# Altium PCB ELosd_rev0.1.PcbDoc
Units mm, origin at the board's own origin, x right, y up, seen from the top; angles counter-clockwise.
Board outline 152.4 x 101.6 mm, 2 copper layers (Top Layer, Bottom Layer), stack 1.569 mm thick; 45 components, 34 nets, 118 pads, 2 vias.
Unrouted connection lines stored in the file: 22.
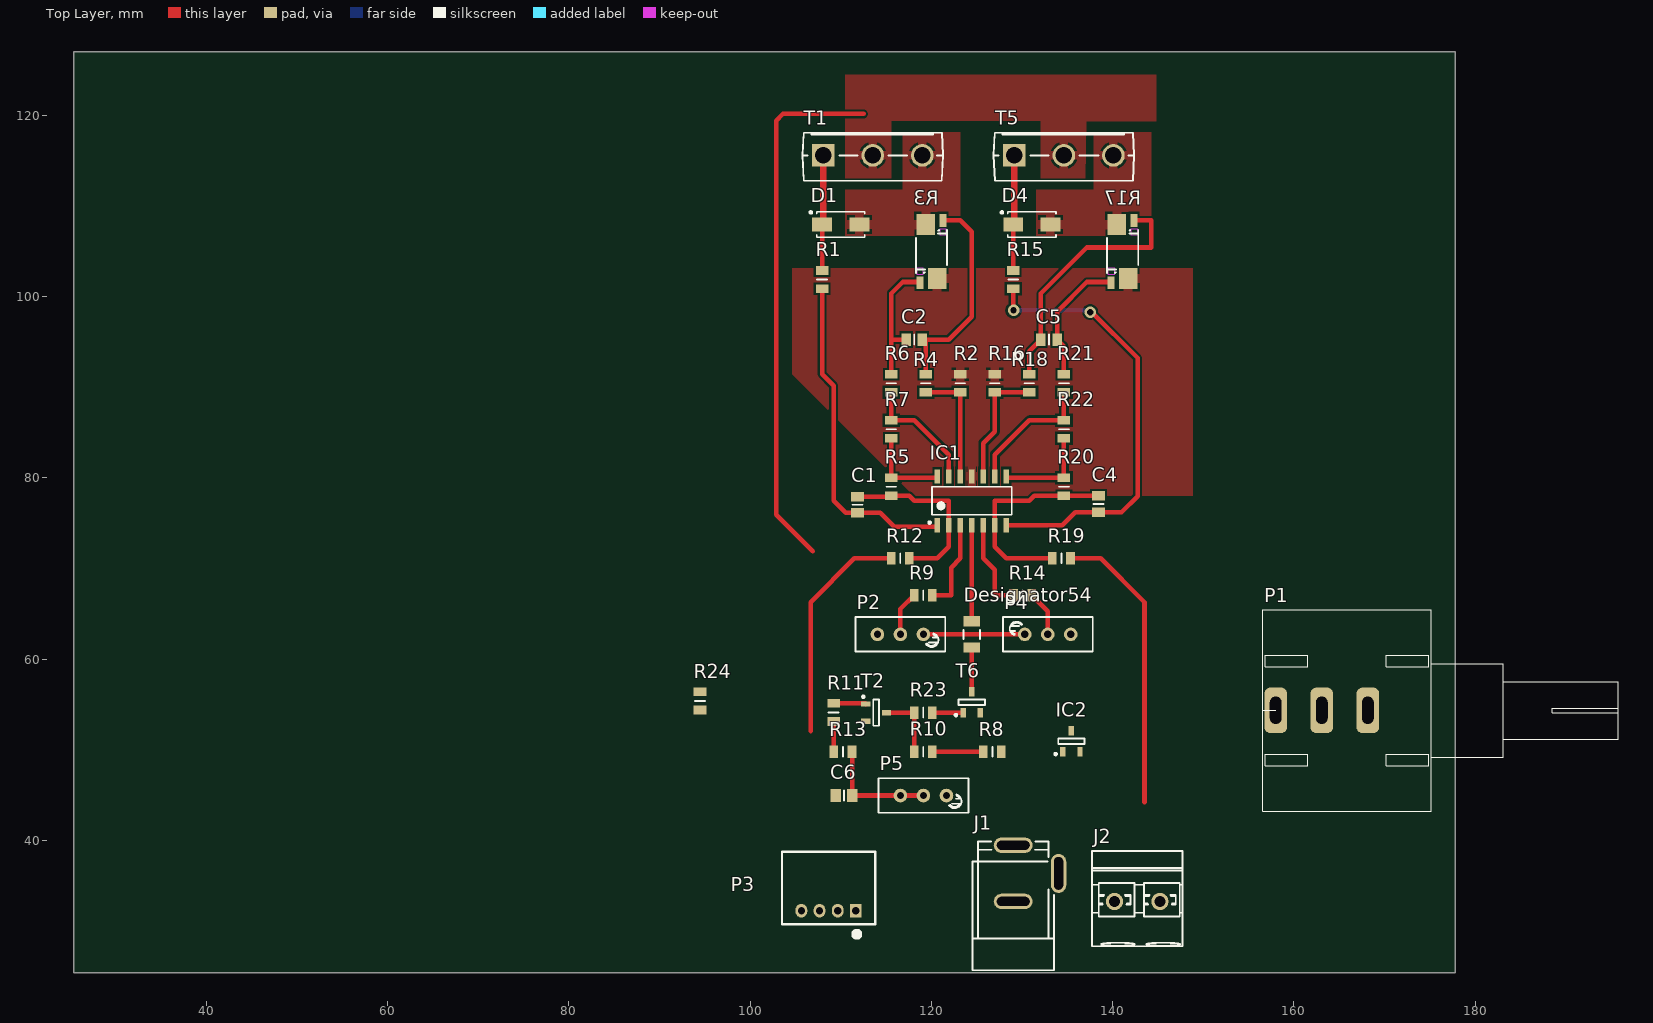
[diagram p0: Top Layer view]
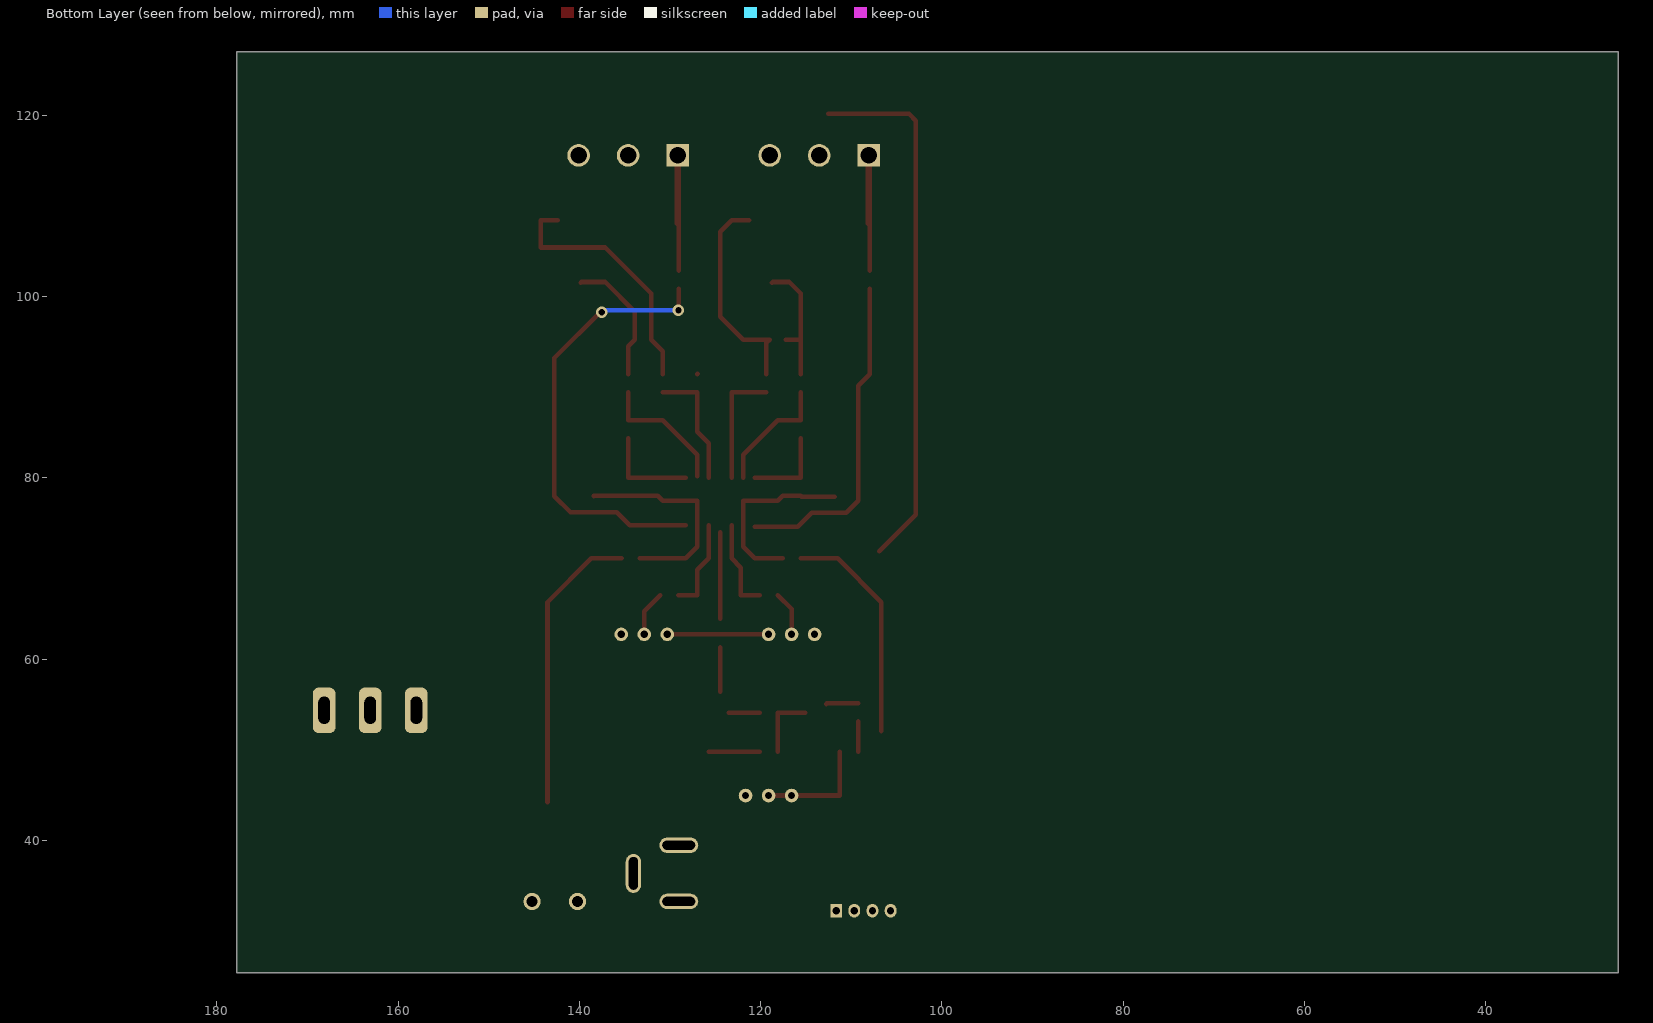
[diagram p1: Bottom Layer view, seen from below]
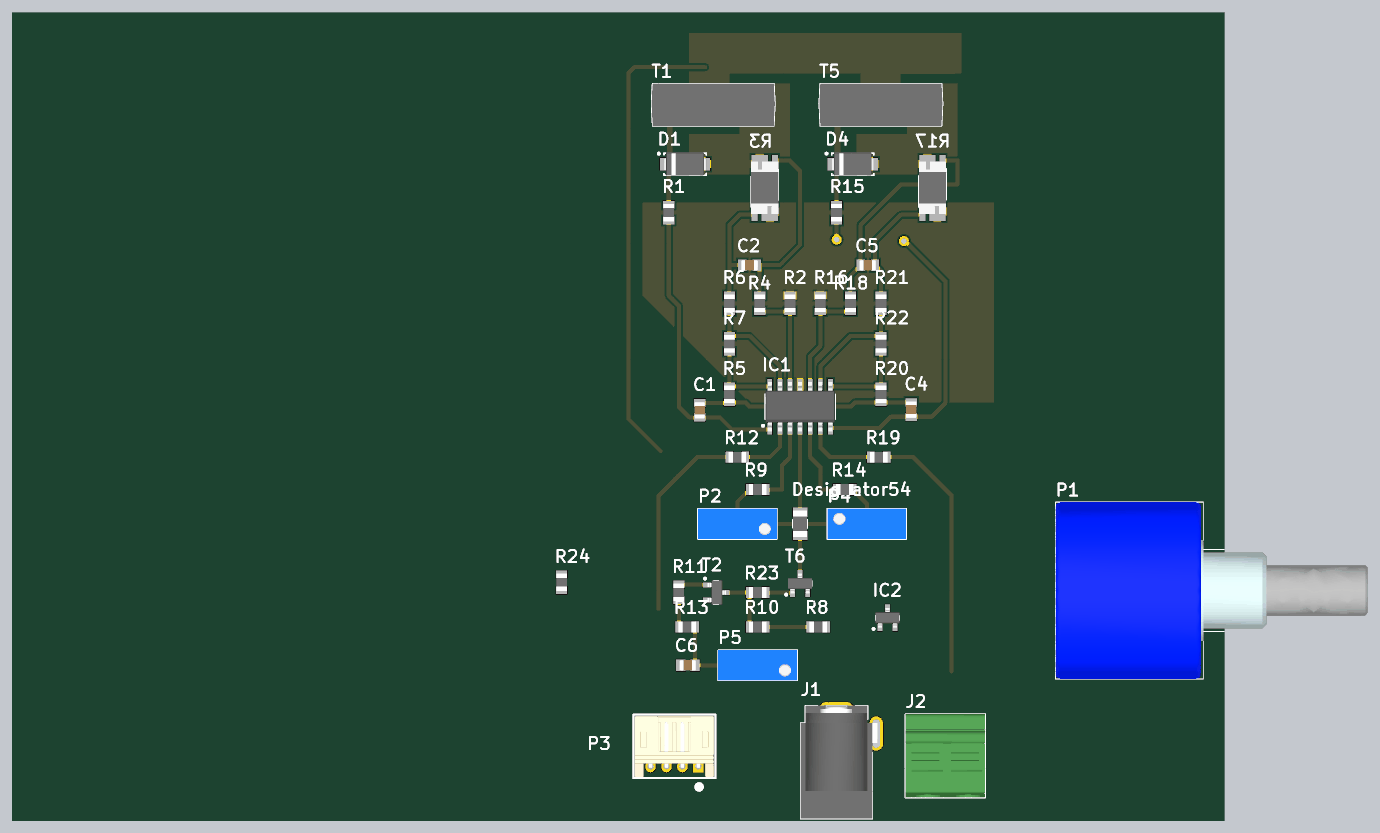
[diagram p2: 3D render of the assembled board from above, using the file's embedded part models]

## Layer stack, top to bottom
Top Solder: solder mask 0.0254, SM-001, Dk 4
Top Layer: signal copper 0.035
Dielectric 1: core 1.4986, Core-043, Dk 4.3
Bottom Layer: signal copper 0.035
Bottom Solder: solder mask 0.0254, SM-001, Dk 4

## Board outline
25.4,25.4 177.8,25.4 177.8,127 25.4,127

## Design rules (kind name [scope] priority, off if disabled: settings)
Clearance [All] p1: gap=0.254 ignorepadtopadclearanceinfootprint=FALSE except(0: Arc-Hole Track-Hole SMDPad-Hole THPad-Hole Via-Hole Fill-Hole Poly-Hole Region-Hole Text-Hole)
PolygonConnect [All] p1: connectstyle=Relief reliefconductorwidth=1 reliefentries=4 polygonreliefangle="90 Angle" airgapwidth=0.254
RoomDefinition ELoad_rev0.1 [InComponentClass('ELoad_rev0.1')] p1: confinementstyle=ConfineIn formatcopy=TRUE lockcomponents=FALSE outline 178.943,26.924 246.761,26.924 246.761,45.466 178.943,45.466
RoutingVias [All] p1: holewidth=0.711 width=1.27 viastyle="Through Hole" minholewidth=0.711 minwidth=1.27 maxholewidth=0.711 maxwidth=1.27
SolderMaskExpansion [All] p1: expansion=0.102 istentingtop=FALSE
Width [All] p1: maxlimit=2.54 minlimit=0.254 preferedwidth=0.254
30 further rules are at their usual default settings.

## Components (designator, comment, footprint, x,y, rotation, side; value= is the part's Value field where it differs from the comment)
C1 "100nF" CAPC2012X135N 111.848,77.032 r270 top
C2 "100nF" CAPC2012X135N 118.11,95.25 r0 top
C4 "100nF" CAPC2012X135N 138.43,77.1 r270 top
C5 "100nF" CAPC2012X135N 132.98,95.25 r180 top
C6 "100nF" CAPC2012X88N 110.352,44.958 r0 top
D1 "SS16" DIOM5127X229N 110,107.95 r0 top
D4 "SS16" DIOM5127X229N 131.082,107.95 r0 top
Designator54 "Comment" RESC3216X65N 124.46,62.738 r90 top
IC1 "LM324M" SOIC127P600X175-14N 124.46,77.47 r90 top
IC2 "TL431ACDBZT" SOT95P237X112-3N 135.448,50.934 r90 top
J1 "Jack" CLIFF_FC68148(DC-10A) 129.032,33.274 r0 top
J2 "" PHOENIX_1792863 142.708,33.274 r0 top
P1 "10k" 3590S 157.988,54.356 r90 top
P2 "1k" TRIM_BOURNS_3290W 116.586,62.738 r180 top
P3 "NXW-04K" NXW-04K 111.664,32.258 r180 top
P4 "1k" TRIM_BOURNS_3290W 132.842,62.738 r0 top
P5 "20k" TRIM_BOURNS_3290W 119.126,44.958 r180 top
R1 "100" RESC2012X60N 107.95,101.87 r90 top
R2 "25k5" RESC2012X60N 123.19,90.44 r90 top
R3 "0R002" RES_VISHAY_WSK2512_0R005-0R2 120.015,104.965 r270 top
R4 "1k" RESC2012X60N 119.38,90.44 r90 top
R5 "2k" RESC2012X60N 115.57,79.01 r90 top
R6 "1k" RESC2012X60N 115.57,90.44 r90 top
R7 "25k5" RESC2012X60N 115.57,85.36 r90 top
R8 "2k" RESC2012X60N 126.73,49.784 r180 top
R9 "2k" RESC2012X60N 119.11,67.056 r0 top
R10 "10k" RESC2012X60N 119.11,49.784 r0 top
R11 "2k" RESC2012X60N 109.22,54.118 r90 top
R12 "1k" RESC2012X60N 116.57,71.12 r0 top
R13 "220k" RESC2012X60N 110.252,49.784 r180 top
R14 "2k" RESC2012X60N 130.064,67.056 r180 top
R15 "100" RESC2012X60N 129.032,101.87 r90 top
R16 "25k5" RESC2012X60N 127,90.44 r90 top
R17 "0R002" RES_VISHAY_WSK2512_0R005-0R2 141.097,104.965 r270 top
R18 "1k" RESC2012X60N 130.81,90.44 r90 top
R19 "1k" RESC2012X60N 134.35,71.12 r180 top
R20 "2k" RESC2012X60N 134.62,79.01 r90 top
R21 "1k" RESC2012X60N 134.62,90.44 r90 top
R22 "25k5" RESC2012X60N 134.62,85.36 r90 top
R23 "100" RESC2012X60N 119.11,54.102 r0 top
R24 "25k5" RESC2012X60N 94.488,55.388 r90 top
T1 "IRFP140NPBF" TO-247AC-v 113.538,115.57 r0 top
T2 "BC846B" SOT95P230X110-3N 113.912,54.102 r0 top
T5 "IRFP140NPBF" TO-247AC-v 134.62,115.57 r0 top
T6 "IRLML6402PBF" SOT95P237X112-3N 124.46,55.238 r90 top

## Footprints (in the part's own frame and the unit in brackets; to place one, negate y for a bottom-side part, rotate by r counter-clockwise, add the part's x,y. Pads: shape width x height; smd on the part's side, far side on the other; paste and mask are expansions set on the pad)
3590S [mm]
  rrect50% 5x2.5 hole 1.27 slot 3 at 0 deg: 1(0,-5.08) 2(0,0) 3(0,-10.16)
  silkscreen extent -11.13,-37.78 11.11,1.44, body extent -11.11,-37.78 11.11,1.44, height 22.22
CAPC2012X88N [mm] "Chip Capacitor, Body 2.0x1.25mm, IPC Medium Density"
  rect 1.15x1.45 smd: 1(-0.9,0) 2(0.9,0)
  silkscreen extent 0,-0.58 0,0.58, body extent -1.05,-0.67 1.05,0.68, height 0.9
CAPC2012X135N [mm] "Chip Capacitor, Body 2.0x1.25mm, IPC Medium Density"
  rect 1.05x1.4 smd: 1(-0.9,0) 2(0.9,0)
  silkscreen extent 0,-0.58 0,0.58, body extent -1.05,-0.67 1.05,0.68, height 1.25
CLIFF_FC68148(DC-10A) [mm] "12V /  5A, 2.1mm Diameter Pin, DC Power Socket With  Switch. DC10A Type"
  rrect100% 4.3x1.7 hole 1 slot 3.6 at 0 deg: 1(0,6.2) 3(0,0)
  rrect100% 1.7x4.3 hole 1 slot 3.6 at 90 deg: 2(5,3.1)
  silkscreen extent -4.5,-7.6 4.5,6.6, body extent -4.5,-7.6 5.2,6.6, height 11
DIOM5127X229N [mm] "DO-214-AC/SMA Molded Diode, 2-Leads, Body 5.1x2.7mm, IPC Medium Density"
  rect 2.2x1.55 smd: 1(-2.05,0) 2(2.05,0)
  silkscreen extent -3.42,-1.4 2.65,1.45, body extent -2.67,-1.45 2.68,1.45, height 2.29
NXW-04K [mm]
  rect 1.3x1.5 hole 0.8: 1(0,0)
  oval 1.3x1.5 hole 0.8: 2(2,0) 3(4,0) 4(6,0)
  silkscreen extent -2.15,-6.5 8.15,2.9, body extent -2,-6.35 8,1.35, height 5
PHOENIX_1792863 [mm] "PHOENIX PTS Serie, Pitch 5mm, 12A, 400V, 2 Positions Header"
  round 1.9 hole 1.2: 1(-2.5,0) 2(2.5,0)
  silkscreen extent -5,-4.95 5,5.55, body extent -5,-4.95 5,5.55, height 13.6
RES_VISHAY_WSK2512_0R005-0R2 [mm] "EIA 2512, Metric 6332, Current Sense Resistor, Chip, 0.89mm H, IPC Medium Density"
  rect 1.4x0.76 smd: E1(-3.43,1.27) E2(3.43,-1.27)
  rect 2.29x2.03 smd: I1(-2.985,-0.635) I2(2.985,0.635)
  Top Layer keep-out region: -2.48,0.89 -1.84,0.89 -1.84,1.65 -2.48,1.65
  Top Layer keep-out region: 2.48,-0.89 1.84,-0.89 1.84,-1.65 2.48,-1.65
  silkscreen extent -2.38,-1.72 2.38,1.72, body extent -3.3,-1.72 3.3,1.72, height 0.89
RESC2012X60N [mm] "Chip Resistor, EIA 0805, Metric 2012, Body 2.0x1.2mm, IPC Medium Density"
  rect 0.95x1.4 smd: 1(-1,0) 2(1,0)
  silkscreen extent 0,-0.55 0,0.55, body extent -1.1,-0.67 1.1,0.68, height 0.6
RESC3216X65N [mm] "Chip Resistor, EIA 1206, Metric 3216, Body 3.2x1.6mm, IPC Medium Density"
  rect 1.15x1.8 smd: 1(-1.45,0) 2(1.45,0)
  silkscreen extent -0.5,-0.9 0.5,0.9, body extent -1.67,-0.87 1.68,0.88, height 0.65
SOIC127P600X175-14N [mm] "SOIC 14, Pitch 1.27mm - Body 4x8.75mm, IPC Medium Density"
  rect 1.55x0.6 smd: 1(-2.7,3.81) 2(-2.7,2.54) 3(-2.7,1.27) 4(-2.7,0) 5(-2.7,-1.27) 6(-2.7,-2.54) 7(-2.7,-3.81) 8(2.7,-3.81) 9(2.7,-2.54) 10(2.7,-1.27) 11(2.7,0) 12(2.7,1.27) 13(2.7,2.54) 14(2.7,3.81)
  silkscreen extent -2.52,-4.4 1.55,4.78, body extent -3.1,-4.37 3.1,4.38, height 1.75
SOT95P230X110-3N [mm] "SOT23, 3 pin, Pitch 0.95mm - 1.3mm W X 2.9mm L X 1.1mm H, IPC Medium Density"
  rect 1x0.6 smd: 1(-1.15,0.95) 2(-1.15,-0.95) 3(1.15,0)
  silkscreen extent -1.52,-1.45 0.33,1.87, body extent -1.08,-1.5 1.25,1.5, height 1.1
SOT95P237X112-3N [mm] "SOT, 0.95mm, pitch; 3 pin,1.30mm W X 2.92mm L X 1.12mm H body, IPC Medium Density"
  rect 1.05x0.6 smd: 1(-1.15,0.95) 2(-1.15,-0.95) 3(1.15,0)
  silkscreen extent -1.52,-1.45 0.3,1.87, body extent -1.25,-1.5 1.25,1.5, height 1.1
TO-247AC-v [mm] "TO-247AC 3-Terminal - Vertical Mount"
  rect 2.5x2.5 hole 1.8: 1(-5.46,0)
  round 2.5 hole 1.8: 2(0,0) 3(5.46,0)
  silkscreen extent -7.75,-2.8 7.75,2.5, body extent -7.75,-2.8 7.75,2.5, height 26.75
TRIM_BOURNS_3290W [mm] "Trimming Potentiometer BOURNS 3290W Series"
  round 1.5 hole 0.8: 1(-2.54,0) 2(0,0) 3(2.54,0)
  silkscreen extent -4.95,-1.91 4.95,1.91, body extent -4.95,-1.9 4.95,1.9, height 10.93

## Part data
C1 C2 C4 C5: library part CC0805_100NF_50V_10%_X7R, "Non-polarised capacitor", Case=0805, Manufacturer=GENERIC, Manufacturer1 ComponentHeight=1mm, Manufacturer1 Example=TDK, Manufacturer1 Part Number=C2012X7R1H104K085AA, Tolerance=±10%, Voltage=50V, Author="CERN DEM JLC", Component Type=Standard, CreateDate=12/3/2007, HelpURL=\\cern.ch\dfs\Applications\Altium\Datasheets\CC0805_X7R_TDK_C.pdf, LatestRevisionDate=4/22/2015, Manufacturer Part Number=CC0805_100NF_50V_10%_X7R, Mounted=Yes, Part Description="SMD Multilayer Chip Ceramic Capacitor", Part Number=CC0805_100NF_50V_10%_X7R, Pin Count=2, Sense=No, SMD=Yes, Socket=No, Status=Preferred, TC=X7R
C6: library part CC0805_100NF_50V_10%_X7R_YUDEN_UMK212B7104KGH, "Non-polarised capacitor", Case=0805, Manufacturer="TAIYO YUDEN", Manufacturer Part Number=UMK212B7104KGH, Tolerance=±10%, Voltage=50V, Author="CERN DEM JLC", Component Type=Standard, ComponentHeight=1.35mm, CreateDate=23.04.2015, HelpURL=\\cern.ch\dfs\Applications\Altium\Datasheets\CC0805_TAIYO-YUDEN_UMK212B7104KGH.pdf, LatestRevisionDate=23.04.2015, Mounted=Yes, Part Description="SMD Multilayer Chip Ceramic Capacitor (High Dielectric Type) for Automotive / Industrial Applications", Part Number=CC0805_100NF_50V_10%_X7R_YUDEN_UMK212B7104KGH, Pin Count=2, Sense=No, SMD=Yes, Socket=No, Status="Not Recommended", TC=X7R
D1 D4: "Schottky Diode", Case=DO-214AC, Manufacturer="VISHAY GENERAL SEMICONDUCTOR", Power=1A, Voltage=60V, Author="CERN DEM JLC", Bonding=No, Component Type=Standard, ComponentHeight=2.29mm, CreateDate=7/15/2008, Device=SS16, HelpURL=\\cern.ch\dfs\Applications\Altium\Datasheets\SS16.pdf, LatestRevisionDate=8/23/2010, Manufacturer Part Number=SS16, Mounted=Yes, PackageDescription="DO-214-AC Molded Diode, Body 5.1x2.7mm, IPC Medium Density", Part Description="Surface Mount Schottky Barrier Rectifier", Part Number=SS16, Pin Count=2, PressFit=No, Sense=No, SMD=Yes, Socket=No
Designator54: library part R1206_0R_JUMPER
IC1: "Quad Operational Amplifier", Case=SOIC14, Manufacturer="FAIRCHILD SEMICONDUCTOR", Author="CERN DEM JLC", Bonding=No, Component Type=Standard, ComponentHeight=1.80mm, CreateDate=8/20/2008, Device=LM324M, HelpURL=\\cern.ch\dfs\Applications\Altium\Datasheets\LM324M.pdf, LatestRevisionDate=8/20/2008, Manufacturer Part Number=LM324M, Mounted=Yes, PackageDescription="SOIC 14, Pitch 1.27mm - Body 4x8.75mm, IPC Medium Density", Part Description="Quad Operational Amplifier", Part Number=LM324M, Pin Count=14, PressFit=No, Sense=No, SMD=Yes, Socket=No, Status="Not recommended"
IC2: "Precision Reference 1=Cathode 2=Adj 3=Anode", Case=SOT23, Manufacturer="TEXAS INSTRUMENTS", Author="CERN DEM JLC", Bonding=No, Component Type=Standard, ComponentHeight=1.12mm, CreateDate=2/28/2011, Device=TL431ACDBZT, HelpURL=\\cern.ch\dfs\Applications\Altium\Datasheets\TL431ACDBZT.pdf, LatestRevisionDate=2/28/2011, Manufacturer Part Number=TL431ACDBZT, Mounted=Yes, PackageDescription="SOT, 0.95mm, Pitch; 3 pin,1.30mm W X 2.92mm L X 1.12mm H Body, IPC Medium Density", Part Description="Vref (2.5V) To 36V 1% Precision Programmable Reference", Part Number=TL431ACDBZT, Pin Count=3, PressFit=No, Sense=No, SMD=Yes, Socket=No
J1: library part CLIFF_FC68148(DC-10A), "12V /  5A, 2.1mm Diameter Pin, DC Power Socket With  Switch. DC10A Type", Manufacturer="CLIFF ELECTRONIC COMPONENTS", Manufacturer Part Number="FC68148 (DC-10A)", Author="CERN DEM JLC", Component Type=Standard, ComponentHeight=11mm, CreateDate=11/23/2010, Family=Jack, HelpURL=\\cern.ch\dfs\Applications\Altium\Datasheets\CLIFF_FC68148(DC-10A).pdf, LatestRevisionDate=11/23/2010, Mounted=Yes, Part Description="12V/5A, 2.1mm Diameter Pin, DC Power Socket With  Switch (DC10A Type)", Part Number=CLIFF_FC68148(DC-10A), Pin Count=3, PressFit=No, Sense=No, SMD=No, Socket=No, Status=None
J2: library part PHOENIX_1792863, "Connector 2 Female", Manufacturer="PHOENIX CONTACT", Manufacturer Part Number="1792863 (PTS 1,5/ 2-5,0-H)", Author="CERN DEM JLC", Component Type=Standard, ComponentHeight=9.2mm, CreateDate=3/24/2014, HelpURL=\\cern.ch\dfs\Applications\Altium\Datasheets\PHOENIX_1792863.pdf, LatestRevisionDate=3/24/2014, Mounted=Yes, Part Description="12A 400V, Pitch: 5mm, 2 Positions Terminal Block (Spring-Cage Connection)", Part Number=PHOENIX_1792863, Pin Count=2, PressFit=No, Sense=No, SMD=No, Socket=No, Status=None
P1: library part TRIM_25T_10K_BOURNS_3296Y-1-103LF, "Trimming Potentiometer", Case=3296Y, Manufacturer=BOURNS, Manufacturer Part Number=3296Y-1-103LF, Power=0.5W, Tolerance=±10%, Author="CERN DEM JLC", Component Type=Standard, ComponentHeight=11.55mm, CreateDate=10/20/2008, HelpURL=\\cern.ch\dfs\Applications\Altium\Datasheets\TRIM_BOURNS_3296Y.pdf, LatestRevisionDate=11/28/2012, Mounted=Yes, Part Description="25 Turn Trimming Potentiometer (Top Adjustement)", Part Number=TRIM_25T_10K_BOURNS_3296Y-1-103LF, Pin Count=3, PressFit=No, Sense=No, SMD=No, Socket=No, TC=±100ppm/°C
P2 P4: library part TRIM_25T_1K_BOURNS_3290W-1-102, "Trimming Potentiometer", Case=3290W, Manufacturer=BOURNS, Manufacturer Part Number=3290W-1-102, Power=1W, Tolerance=±5%, Author="CERN DEM MR", Component Type=Standard, ComponentHeight=9.91mm, CreateDate=11/23/2016, HelpURL=\\cern.ch\dfs\Applications\Altium\Datasheets\TRIM_BOURNS_3290W.pdf, LatestRevisionDate=11/23/2016, Mounted=Yes, Part Description="25 Turn Trimming Potentiometer (Top Adjustement)", Part Number=TRIM_25T_1K_BOURNS_3290W-1-102, Pin Count=3, PressFit=No, Sense=No, SMD=No, Socket=No, TC=±50ppm/°C
P3: library part "Header 4", "Header, 4-Pin", LatestRevisionDate=17-Jul-2002, LatestRevisionNote="Re-released for DXP Platform.", Parameter 1=LCD_UART, Publisher="Altium Limited"
P5: library part TRIM_25T_20K_BOURNS_3290W-1-203, "Trimming Potentiometer", Case=3290W, Manufacturer=BOURNS, Manufacturer Part Number=3290W-1-203, Power=1W, Tolerance=±5%, Author="CERN DEM BC", Component Type=Standard, ComponentHeight=9.91mm, CreateDate=3/1/2017, HelpURL=\\cern.ch\dfs\Applications\Altium\Datasheets\TRIM_BOURNS_3290W.pdf, LatestRevisionDate=3/1/2017, Mounted=Yes, Part Description="25 Turn Trimming Potentiometer (Top Adjustement)", Part Number=TRIM_25T_20K_BOURNS_3290W-1-203, Pin Count=3, PressFit=No, Sense=No, SMD=No, Socket=No, TC=±50ppm/°C
R1 R15 R23: library part R0805_100R_1%_0.125W_100PPM, "Resistor - 1%", Case=0805, Manufacturer=GENERIC, Manufacturer1 ComponentHeight=0.6mm, Manufacturer1 Example="NIC COMPONENT", Manufacturer1 Part Number=NRC10F4700TRF, Power=0.125W, Tolerance=±1%, Author="CERN DEM JLC", Component Type=Standard, CreateDate=12/3/2007, HelpURL=\\cern.ch\dfs\Applications\Altium\Datasheets\R0805_NIC_NRC.pdf, LatestRevisionDate=3/13/2008, Manufacturer Part Number=R0805_100R_1%_0.125W_100PPM, Mounted=Yes, Part Description="General Purpose Thick Film Chip Resistor", Part Number=R0805_100R_1%_0.125W_100PPM, Pin Count=2, PressFit=No, Sense=No, SMD=Yes, Socket=No, Status=Preferred, TC=±100ppm/°C
R2 R7 R16 R22 R24: library part R0805_25K5_0.1%_0.1W_10PPM, "Resistor - 0.1%", Case=0805, Manufacturer=GENERIC, Manufacturer1 ComponentHeight=0.6mm, Manufacturer1 Example="TYCO HOLSWORTHY", Manufacturer1 Part Number=RN73C2A25K5BTG, Power=0.1W, Tolerance=±0.1%, Author="CERN DEM JLC", Component Type=Standard, CreateDate=12/3/2007, HelpURL=\\cern.ch\dfs\Applications\Altium\Datasheets\R0805_Tyco_RN73.pdf, LatestRevisionDate=3/13/2008, Manufacturer Part Number=R0805_25K5_0.1%_0.1W_10PPM, Mounted=Yes, Part Description="Thin Film Chip Resistor", Part Number=R0805_25K5_0.1%_0.1W_10PPM, Pin Count=2, PressFit=No, Sense=No, SMD=Yes, Socket=No, Status="Not Recommended", TC=±10ppm
R3 R17: library part R2512_0R002_1%_1W_35PPM_VISHAY_WSK2512, "Power and Current Sensing Resistor", Case=2512, Manufacturer="VISHAY DALE", Manufacturer Part Number=WSK25122L000FEA, Power=1W, Tolerance=±1%, Author="CERN DEM MR", Component Type=Standard, ComponentHeight=0.89mm, CreateDate=11/8/2016, HelpURL=\\cern.ch\dfs\Applications\Altium\Datasheets\R2512_VISHAY_WSK2512.pdf, LatestRevisionDate=11/8/2016, Mounted=Yes, Part Description="Power Metal Strip® Resistor, Low Value", Part Number=R2512_0R002_1%_1W_35PPM_VISHAY_WSK2512, Pin Count=4, PressFit=No, Sense=No, SMD=Yes, Socket=No, Status=None, TC=±35ppm/°C
R4 R6 R18 R21: library part R0805_1K_0.1%_0.125W_25PPM, "Resistor - 0.1%", Case=0805, Manufacturer=GENERIC, Manufacturer1 ComponentHeight=0.6mm, Manufacturer1 Example=PANASONIC, Manufacturer1 Part Number=ERA6AEB102V, Power=0.125W, Tolerance=±0.1%, Author="CERN DEM JLC", Component Type=Standard, CreateDate=10/18/2010, HelpURL=\\cern.ch\dfs\Applications\Altium\Datasheets\R0805_PANASONIC_ERA.pdf, LatestRevisionDate=10/18/2010, Manufacturer Part Number=R0805_1K_0.1%_0.125W_25PPM, Mounted=Yes, Part Description="Thin Film Chip Resistor", Part Number=R0805_1K_0.1%_0.125W_25PPM, Pin Count=2, PressFit=No, Sense=No, SMD=Yes, Socket=No, Status="Not Recommended", TC=±25ppm
R5 R8 R9 R11 R14 R20: library part R0805_2K_1%_0.125W_100PPM, "Resistor - 1%", Case=0805, Manufacturer=GENERIC, Manufacturer1 ComponentHeight=0.6mm, Manufacturer1 Example="NIC COMPONENT", Manufacturer1 Part Number=NRC10F2001TRF, Power=0.125W, Tolerance=±1%, Author="CERN DEM JLC", Component Type=Standard, CreateDate=12/3/2007, HelpURL=\\cern.ch\dfs\Applications\Altium\Datasheets\R0805_NIC_NRC.pdf, LatestRevisionDate=3/13/2008, Manufacturer Part Number=R0805_2K_1%_0.125W_100PPM, Mounted=Yes, Part Description="General Purpose Thick Film Chip Resistor", Part Number=R0805_2K_1%_0.125W_100PPM, Pin Count=2, PressFit=No, Sense=No, SMD=Yes, Socket=No, Status=Preferred, TC=±100ppm/°C
R10: library part R0805_10K_1%_0.125W_100PPM, "Resistor - 1%", Case=0805, Manufacturer=GENERIC, Manufacturer1 ComponentHeight=0.6mm, Manufacturer1 Example="NIC COMPONENT", Manufacturer1 Part Number=NRC10F1002TRF, Power=0.125W, Tolerance=±1%, Author="CERN DEM JLC", Component Type=Standard, CreateDate=12/3/2007, HelpURL=\\cern.ch\dfs\Applications\Altium\Datasheets\R0805_NIC_NRC.pdf, LatestRevisionDate=3/13/2008, Manufacturer Part Number=R0805_10K_1%_0.125W_100PPM, Mounted=Yes, Part Description="General Purpose Thick Film Chip Resistor", Part Number=R0805_10K_1%_0.125W_100PPM, Pin Count=2, PressFit=No, Sense=No, SMD=Yes, Socket=No, Status=Preferred, TC=±100ppm/°C
R12 R19: library part R0805_1K_1%_0.125W_100PPM, "Resistor - 1%", Case=0805, Manufacturer=GENERIC, Manufacturer1 ComponentHeight=0.6mm, Manufacturer1 Example="NIC COMPONENT", Manufacturer1 Part Number=NRC10F1001TRF, Power=0.125W, Tolerance=±1%, Author="CERN DEM JLC", Component Type=Standard, CreateDate=12/3/2007, HelpURL=\\cern.ch\dfs\Applications\Altium\Datasheets\R0805_NIC_NRC.pdf, LatestRevisionDate=3/13/2008, Manufacturer Part Number=R0805_1K_1%_0.125W_100PPM, Mounted=Yes, Part Description="General Purpose Thick Film Chip Resistor", Part Number=R0805_1K_1%_0.125W_100PPM, Pin Count=2, PressFit=No, Sense=No, SMD=Yes, Socket=No, Status=Preferred, TC=±100ppm/°C
R13: library part R0805_220K_1%_0.125W_100PPM, "Resistor - 1%", Case=0805, Manufacturer=GENERIC, Manufacturer1 ComponentHeight=0.6mm, Manufacturer1 Example="NIC COMPONENT", Manufacturer1 Part Number=NRC10F2203TRF, Power=0.125W, Tolerance=±1%, Author="CERN DEM JLC", Component Type=Standard, CreateDate=12/3/2007, HelpURL=\\cern.ch\dfs\Applications\Altium\Datasheets\R0805_NIC_NRC.pdf, LatestRevisionDate=3/13/2008, Manufacturer Part Number=R0805_220K_1%_0.125W_100PPM, Mounted=Yes, Part Description="General Purpose Thick Film Chip Resistor", Part Number=R0805_220K_1%_0.125W_100PPM, Pin Count=2, PressFit=No, Sense=No, SMD=Yes, Socket=No, Status=Preferred, TC=±100ppm/°C
T1 T5: library part IRFP140NPBF_v, "N-CHANNEL MOSFET WITH ZENER DIODE", Case=TO-247, Manufacturer="INTERNATIONAL RECTIFIER", Author="CERN DEM JLC", Bonding=No, Component Type=Standard, ComponentHeight=24.6mm, CreateDate=1/16/2012, Device=IRFP140NPBF, HelpURL=\\cern.ch\dfs\Applications\Altium\Datasheets\IRFP140NPBF.pdf, LatestRevisionDate=1/16/2012, Manufacturer Part Number=IRFP140NPBF, Mounted=Yes, PackageDescription="TO-247AC 3-Terminal - Vertical Mount", Part Description="100V 33A N-Channel HEXFET® Power MOSFET", Part Number=IRFP140NPBF_v, Pin Count=3, PressFit=No, Sense=No, SMD=No, Socket=No
T2: "NPN Transistor", Case=SOT23-3, Manufacturer="NXP SEMICONDUCTORS", Author="CERN DEM JLC", Bonding=No, Component Type=Standard, ComponentHeight=1.1mm, CreateDate=10.03.2011, Device=BC846B, HelpURL=\\cern.ch\dfs\Applications\Altium\Datasheets\BC846B.pdf, LatestRevisionDate=10.03.2011, Manufacturer Part Number=BC846B, Mounted=Yes, PackageDescription="SOT23, 3 pin, Pitch 0.95mm - 1.3mm W X 2.9mm L X 1.1mm H, IPC Medium Density", Part Description="65 V 100mA NPN general-purpose transistors", Part Number=BC846B, Pin Count=3, PressFit=No, Sense=No, SMD=Yes, Socket=No
T6: "P-CHANNEL MOSFET WITH ZENER DIODE", Case=SOT23-3, Manufacturer="INTERNATIONAL RECTIFIER", Author="CERN DEM JLC", Bonding=No, Component Type=Standard, ComponentHeight=1.12mm, CreateDate=8/29/2011, Device=IRLML6402PBF, HelpURL=\\cern.ch\dfs\Applications\Altium\Datasheets\IRLML6402PBF.pdf, LatestRevisionDate=8/29/2011, Manufacturer Part Number=IRLML6402PBF, Mounted=Yes, PackageDescription="SOT, 0.95mm, pitch; 3 pin,1.30mm W X 2.92mm L X 1.12mm H body, IPC Medium Density", Part Description="-20V -3.7A P-Channel HEXFET® Power MOSFET", Part Number=IRLML6402PBF, Pin Count=3, PressFit=No, Sense=No, SMD=Yes, Socket=No

## Via types
v1: diameter 1.27, hole 0.711, Top Layer to Bottom Layer, 2 vias

## Nets (pads, with @x,y where several pads share a name; then routed paths per layer and width w, separated by ;. In a path a pad name is that pad's centre, name@x,y a point inside that pad or via, vN(x,y) a via of type N, cw(c..) or ccw(c..) an arc to the next point about the centre after c; other vN are vias at no path point)
12V: J1.1 J2.1 R8.2 R10.2 T6.2 | length 5.6
  Top Layer w0.508: R10.2 R8.2
ADC_Vload: C6.2 P3.2 P5.2 P5.3 R13.1 | length 12.7
  Top Layer w0.508: R13.1 C6.2 P5.3 P5.2
cur1: P3.4 R12.1 | length 25.1
  Top Layer w0.508: 106.68,52.07 106.68,66.294 111.506,71.12 R12.1
cur2: P3.3 R19.1 | length 32.3
  Top Layer w0.508: R19.1 138.684,71.12 143.51,66.294 143.51,44.196
GND: C6.1 IC1.11 IC2.3 J1.3 J2.2 P1.3 P2.3 P3.1 P4.3 P5.1 R2.2 R3.I2 R16.2 R17.I2 T2.2 | length 0
  Top Layer w0.508: R16.2@126.968,91.472 R16.2
Load+: R11.1 R13.2 T1.2 T5.2 | length 62.5
  Top Layer w0.508: 106.934,71.882 102.87,75.946 102.87,119.38 103.632,120.142 112.522,120.142 ; R11.1 109.22,49.816 R13.2
NetC1_1: C1.1 IC1.2 R5.1 R12.2 | length 20.3
  Top Layer w0.508: C1.1 115.492,77.932 R5.1 117.57,78.01 118.11,77.47 121.92,77.47 IC1.2 121.92,72.39 120.65,71.12 R12.2
NetC1_2: C1.2 IC1.1 R1.1 | length 36.5
  Top Layer w0.508: R1.1 107.95,91.44 109.22,90.17 109.22,77.47 110.558,76.132 C1.2 114.368,76.132 115.89,74.61 IC1.1@120.65,74.61
NetC2_1: C2.1 R3.E2 R6.2 | length 14.3
  Top Layer w0.508: R6.2 115.57,95.25 ; C2.1 115.57,95.25 ; R3.E2 118.68,101.6 116.84,101.6 115.57,100.33 115.57,95.25
NetC2_2: C2.2 R3.E1 R4.2 | length 23.5
  Top Layer w0.508: R4.2 119.38,94.88 C2.2 121.92,95.25 124.46,97.79 124.46,107.125 123.19,108.395 R3.E1
NetC4_1: C4.1 IC1.6 R19.2 R20.1 | length 23.6
  Top Layer w0.508: R19.2 128.27,71.12 127,72.39 IC1.6 127,77.47 130.81,77.47 131.35,78.01 R20.1 138.42,78.01 C4.1
NetC4_2: C4.2 IC1.7 R15.1 | length 49.4
  Top Layer w0.508: IC1.7 134.46,74.77 135.89,76.2 C4.2 140.97,76.2 142.748,77.978 142.748,93.218 v1@137.598,98.368 ; R15.1 129.032,98.501 v1(129.062,98.471)
  Bottom Layer w0.508: v1(129.062,98.471) 137.333,98.471 137.414,98.552 137.517,98.449 v1(137.517,98.287)
NetC5_1: C5.1 R17.E2 R21.2 | length 14.5
  Top Layer w0.508: R21.2 134.62,94.51 C5.1 133.88,98.32 137.16,101.6 139.762,101.6 R17.E2
NetC5_2: C5.2 R17.E1 R18.2 | length 28.6
  Top Layer w0.508: R18.2 130.81,93.98 C5.2 132.08,100.33 137.16,105.41 144.272,105.41 144.272,108.395 R17.E1
NetD1_1: D1.1 R1.2 T1.1 | length 12.8
  Top Layer w0.508: R1.2 D1.1 D1.1@108.078,108.078
  Top Layer w0.7: D1.1@108.078,108.078 T1.1
NetD1_2: D1.2 R3.I1 T1.3
NetD4_1: D4.1 R15.2 T5.1 | length 12.8
  Top Layer w0.508: R15.2 D4.1 D4.1@129.16,108.078
  Top Layer w0.7: D4.1@129.16,108.078 T5.1
NetD4_2: D4.2 R17.I1 T5.3
NetIC1_3: IC1.3 R9.2 | length 10.2
  Top Layer w0.508: R9.2 122.174,67.056 122.174,70.104 123.19,71.12 IC1.3
NetIC1_5: IC1.5 R14.2 | length 10.3
  Top Layer w0.508: IC1.5 125.73,71.12 127,69.85 127,67.056 R14.2
NetIC1_8: IC1.8 R20.2 R22.1 | length 10.7
  Top Layer w0.508: IC1.8@128.27,80.01 R20.2 R22.1
NetIC1_9: IC1.9 R21.1 R22.2 | length 14.7
  Top Layer w0.508: IC1.9 127,82.55 130.81,86.36 R22.2 R21.1
NetIC1_10: IC1.10 R16.1 R18.1 | length 13.8
  Top Layer w0.508: IC1.10@125.73,80.01 125.73,83.82 127,85.09 R16.1 R18.1
NetIC1_12: IC1.12 R2.1 R4.1 | length 13.2
  Top Layer w0.508: R4.1 R2.1 IC1.12@123.19,80.01
NetIC1_13: IC1.13 R6.1 R7.2 | length 13.5
  Top Layer w0.508: R6.1 R7.2 118.11,86.36 121.92,82.55 IC1.13 IC1.13@121.92,80.01
NetIC1_14: IC1.14 R5.2 R7.1 | length 9.4
  Top Layer w0.508: R7.1 R5.2 IC1.14@120.65,80.01
NetIC2_1: IC2.1 IC2.2 P1.1 R8.1
NetP1_2: P1.2 P2.1 P4.1 | length 11.2
  Top Layer w0.508: P2.1 P4.1
NetP2_2: P2.2 R9.1 | length 4.9
  Top Layer w0.508: P2.2 116.586,65.532 R9.1
NetP4_2: P4.2 R14.1 | length 5.1
  Top Layer w0.508: R14.1 132.842,65.278 P4.2
NetR10_1: R10.1 R23.1 T2.3 | length 7.4
  Top Layer w0.508: T2.3 R23.1 R10.1
NetR11_2: R11.2 T2.1 | length 3.6
  Top Layer w0.508: R11.2 112.696,55.118 T2.1
NetR23_2: R23.2 T6.1 | length 3.4
  Top Layer w0.508: R23.2 123.496,54.102 T6.1
OP_Sulply: Designator54.1 Designator54.2 IC1.4 T6.3 | length 14.5
  Top Layer w0.508: T6.3 Designator54.1 ; Designator54.2@124.46,64.442 IC1.4@124.46,74.008
pads on no net: J1.2 R24.1 R24.2

## Polygon pours and split planes (outlines as drawn)
GND on Top Layer "GND_L01_P003" (solid, remove dead copper, pour order 3): 104.648,103.124 148.844,103.124 148.844,78.01 118.078,78.01 104.648,91.44
NetD4_2 on Top Layer "NETD4_2_L01_P002" (solid, pour order 2): 137.922,118.11 137.922,111.76 131.572,111.76 131.572,106.68 144.272,106.68 144.272,118.11
NetD1_2 on Top Layer "NETD1_2_L01_P000" (solid, pour order 0): 116.84,118.11 116.84,111.76 110.49,111.76 110.49,106.68 123.19,106.68 123.19,118.11
Load+ on Top Layer "LOAD+_L01_P001" (solid, pour order 1): 115.57,113.03 110.49,113.03 110.49,124.46 144.78,124.46 144.78,119.322 137.073,119.293 136.996,113.03 132.08,113.03 132.08,119.38 115.57,119.38